# Altium PCB USB2BT.PcbDoc
Units mm, origin at the board's own origin, x right, y up, seen from the top; angles counter-clockwise.
Board outline 152.4 x 101.6 mm, 2 copper layers (Top Layer, Bottom Layer); 8 components, 8 nets, 61 pads, 6 vias.
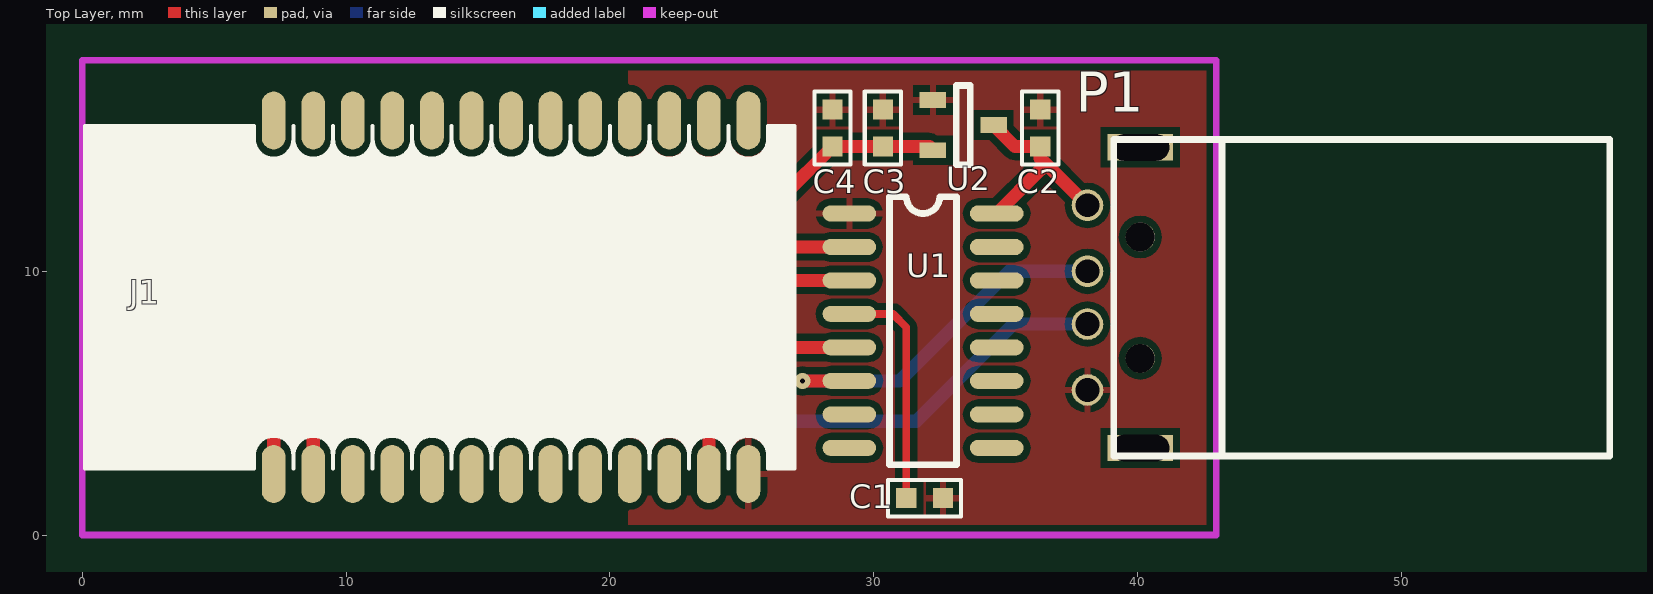
[diagram p0: Top Layer view]
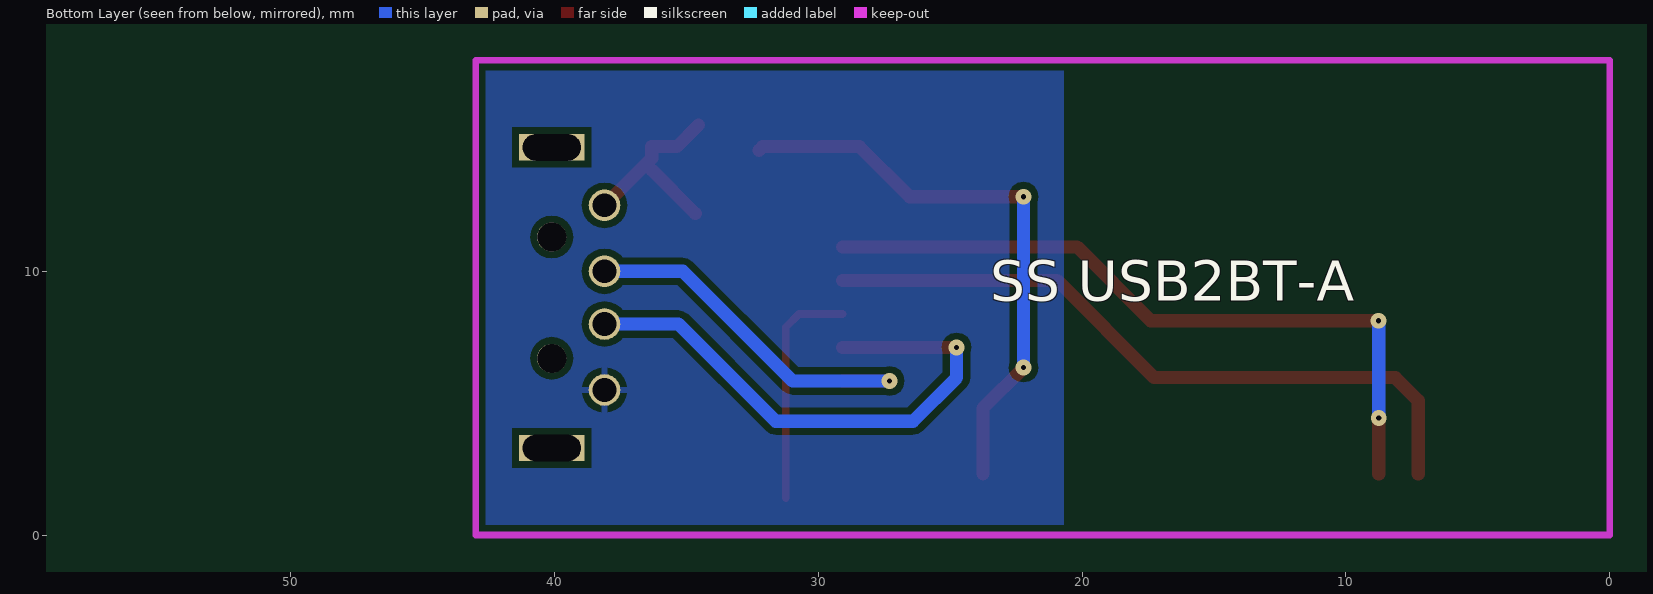
[diagram p1: Bottom Layer view, seen from below]
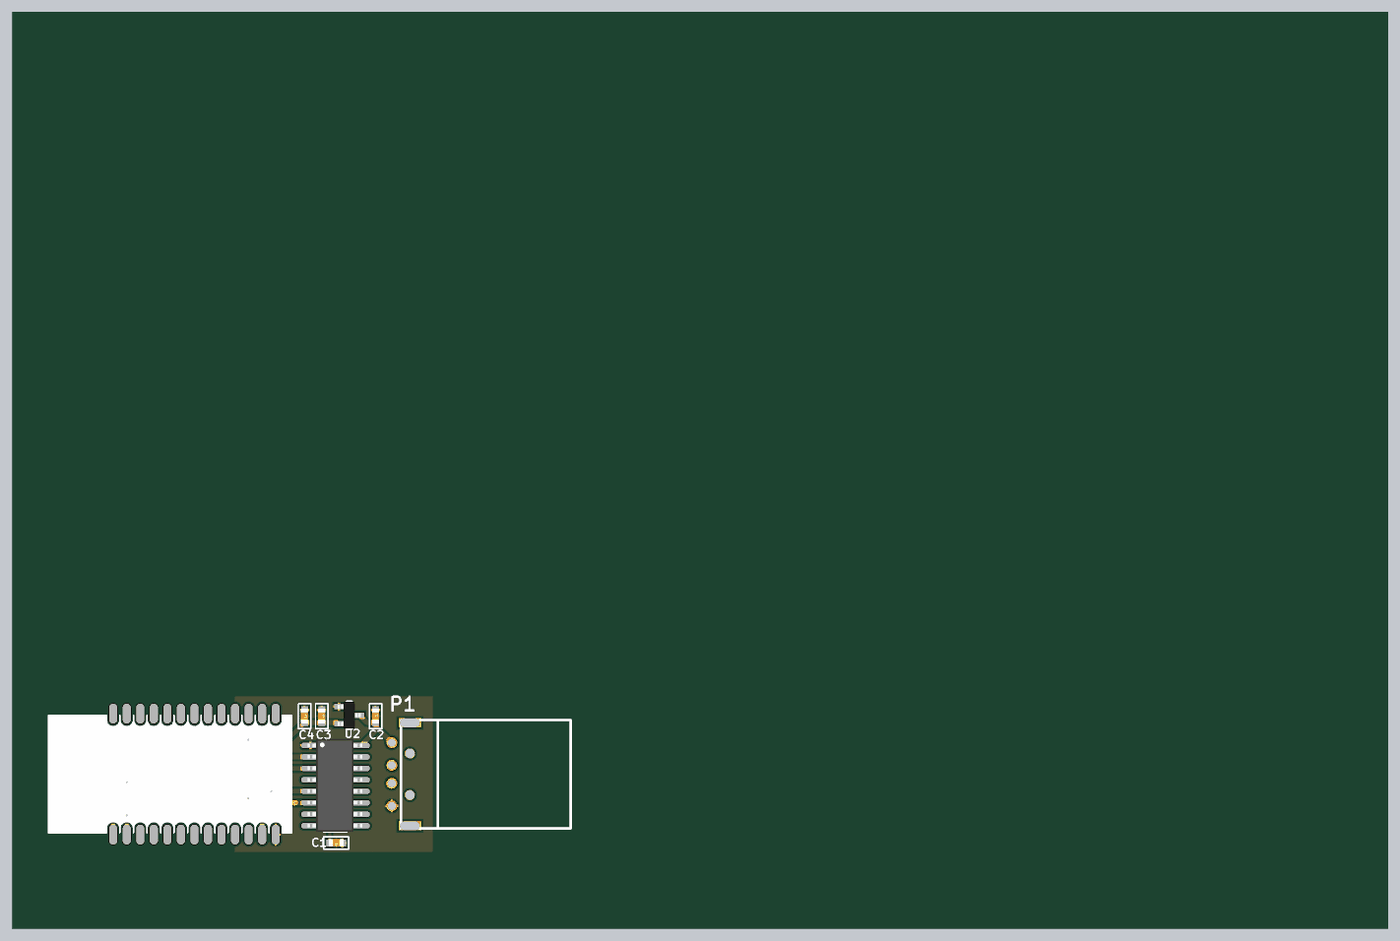
[diagram p2: 3D render of the assembled board from above, using the file's embedded part models]

## Layer stack, top to bottom
Top Solder: solder mask 0.0102, Solder Resist, Dk 3.5
Top Layer: signal copper 0.0356
Dielectric 1: dielectric 0.32, FR-4, Dk 4.8
Bottom Layer: signal copper 0.0356
Bottom Solder: solder mask 0.0102, Solder Resist, Dk 3.5

## Board outline
-3.937,-8.128 148.463,-8.128 148.463,93.472 -3.937,93.472

## Design rules (kind name [scope] priority, off if disabled: settings)
Clearance [All] p1: gap=0.254
PolygonConnect [All] p1: connectstyle=Relief reliefconductorwidth=0.254 reliefentries=4 polygonreliefangle="90 Angle" airgapwidth=0.254
RoutingVias [All] p1: holewidth=0.711 width=1.27 viastyle="Through Hole" minholewidth=0.711 minwidth=1.27 maxholewidth=0.711 maxwidth=1.27
SolderMaskExpansion [All] p1: expansion=0.102
Width [All] p1: maxlimit=1 minlimit=0.254 preferedwidth=0.254
29 further rules are at their usual default settings.

## Classes and differential pairs
component class USB2BT: C1 C2 C3 C4 J1 U1 U2

## Components (designator, comment, footprint, x,y, rotation, side; value= is the part's Value field where it differs from the comment)
C1 "100nF" 0603C 32.639,1.397 r180 top
C2 "100nF" 0603C 36.322,16.129 r270 top
C3 "100nF" 0603C 30.353,16.129 r270 top
C4 "100nF" 0603C 28.448,16.129 r270 top
J1 "HDR2x15" HC-05/06/08V15 16.256,9.017 r180 top
P1 "USB-A-M" USB-A-M 57.912,15 r180 top
U1 "CH340C" SO-16 29.083,12.192 r0 top
U2 "662K" SOT-23 33.401,15.543 r270 top

## Footprints (in the part's own frame and the unit in brackets; to place one, negate y for a bottom-side part, rotate by r counter-clockwise, add the part's x,y. Pads: shape width x height; smd on the part's side, far side on the other; paste and mask are expansions set on the pad)
0603C [mil]
  rect 30x30 smd: 1(0,0) 2(55,0)
  silkscreen extent -27,-27 82,27, body extent -4,-16 59,16, height 12
HC-05/06/08V15 [mm]
  oval 0.9x2.2 smd: 1(9,6.7) 2(7.5,6.7) 3(6,6.7) 4(4.5,6.7) 5(3,6.7) 6(1.5,6.7) 7(0,6.7) 8(-1.5,6.7) 9(-3,6.7) 10(-4.5,6.7) 11(-6,6.7) 12(-7.5,6.7) 13(-9,6.7) 22(-9,-6.7) 23(-7.5,-6.7) 24(-6,-6.7) 25(-4.5,-6.7) 26(-3,-6.7) 27(-1.5,-6.7) 28(0,-6.7) 29(1.5,-6.7) 30(3,-6.7) 31(4.5,-6.7) 32(6,-6.7) 33(7.5,-6.7) 34(9,-6.7)
  silkscreen extent -10.75,-6.5 16.15,6.5
SO-16 [mil]
  oval 80x24 smd: 1(0,0) 2(0,-50) 3(0,-100) 4(0,-150) 5(0,-200) 6(0,-250) 7(0,-300) 8(0,-350) 9(220,-350) 10(220,-300) 11(220,-250) 12(220,-200) 13(220,-150) 14(220,-100) 15(220,-50) 16(220,0)
  silkscreen extent 60,-375 160,25, body extent -12,-377 226,29, height 77
SOT-23 [mm] "SOT-23-3"
  rect 0.6x1 smd: 1(-0.95,-1.15) 2(0.95,-1.15) 3(0,1.15)
  silkscreen extent -1.5,-0.27 1.5,0.27, body extent -1.46,-1.28 1.46,1.27, height 0.99
USB-A-M [mm] "USB-A 公头"
  round 1.1 hole 1.1: 0(17.8,3.7) 0(17.8,8.3)
  round 1.2 hole 0.9: 1(19.8,2.5) 2(19.8,5) 3(19.8,7) 4(19.8,9.5)
  rect 2.5x1 hole 1 slot 2.2 at 0 deg: 5(17.8,0.3) 6(17.8,11.7)
  silkscreen extent 0,0 18.8,12

## Part data
C1: library part C
C2 C3 C4: library part Cap, "Capacitor"
J1: "Connector"
P1: library part USB-B
U1: library part CH340G, "USB2UART"

## Via types
v1: diameter 0.6, hole 0.2, Top Layer to Bottom Layer, 6 vias

## Nets (pads, with @x,y where several pads share a name; then routed paths per layer and width w, separated by ;. In a path a pad name is that pad's centre, name@x,y a point inside that pad or via, vN(x,y) a via of type N, cw(c..) or ccw(c..) an arc to the next point about the centre after c; other vN are vias at no path point)
D3V3: C3.2 C4.2 J1.12 U2.2 | length 22
  Top Layer w0.5: v1(22.225,6.35) 23.756,4.819 J1.12 ; v1(22.225,12.827) 26.543,12.827 C4.2 C3.2 32.112,14.732 U2.2
  Bottom Layer w0.5: v1(22.225,6.35) v1(22.225,12.827)
GND: C1.1 C2.1 C3.1 C4.1 J1.13 P1.4 U1.1 U2.1
NetC1_2: C1.2 U1.4 | length 8.8
  Top Layer w0.3: U1.4 30.734,8.382 31.242,7.874 C1.2
NetP1_2: P1.2 U1.6 | length 14.3
  Top Layer w0.5: v1(27.305,5.842) U1.6
  Bottom Layer w0.5: v1(27.305,5.842) 30.988,5.842 35.146,10 P1.2
NetP1_3: P1.3 U1.5 | length 21
  Top Layer w0.5: v1(24.765,7.112) U1.5
  Bottom Layer w0.5: v1(24.765,7.112) 24.765,5.969 26.416,4.318 31.623,4.318 35.305,8 P1.3
RXD: J1.1 U1.3 | length 26.5
  Top Layer w0.5: J1.1 7.256,5.097 8.128,5.969 17.272,5.969 20.955,9.652 U1.3
TXD: J1.2 U1.2 | length 27.3
  Top Layer w0.5: J1.2 v1(8.756,4.438) ; v1(8.763,8.128) 17.399,8.128 20.193,10.922 U1.2
  Bottom Layer w0.5: v1(8.756,4.438) v1@8.756,8.121
VBUS: C2.2 P1.1 U1.16 U2.3 | length 7.6
  Top Layer w0.5: U2.3 35.362,14.732 C2.2 36.322,14.29 38.013,12.599 P1.1@38.013,12.26 ; U1.16 36.322,13.843
pads on no net: J1.3 J1.4 J1.5 J1.6 J1.7 J1.8 J1.9 J1.10 J1.11 J1.22 J1.23 J1.24 J1.25 J1.26 J1.27 J1.28 J1.29 J1.30 J1.31 J1.32 J1.33 J1.34 P1.0 P1.5 P1.6 U1.7 U1.8 U1.9 U1.10 U1.11 U1.12 U1.13 U1.14 U1.15

## Polygon pours and split planes (outlines as drawn)
GND on Top Layer "Bottom Layer-No Net" (solid, remove dead copper, pour order 4): 20.701,0 20.701,18 43,18 43,0
GND on Bottom Layer "Bottom Layer-No Net" (solid, remove dead copper, pour order 6): 20.701,0 20.701,18 43,18 43,0

## Keep-outs
Keep-Out Layer:
  lines w0.254: 0,0 0,18 43,18 43,0 0,0

## Silkscreen, mask and mechanical layers (free items; w line width, h text height)
Bottom Overlay:
  text "SS USB2BT-A" at 23.495,8.89 h1.52